# Altium PCB SPITEMP3.PcbDoc
Units mm, origin at the board's own origin, x right, y up, seen from the top; angles counter-clockwise.
Board outline 20.07 x 14.48 mm, 2 copper layers (Top Layer, Bottom Layer); 3 components, 6 nets, 18 pads, 3 vias.
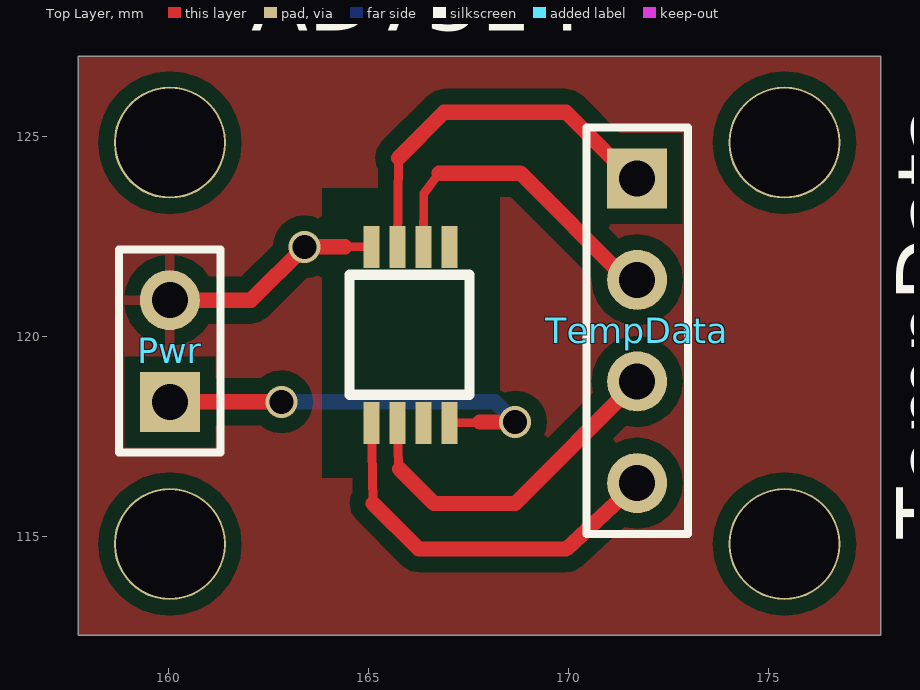
[diagram p0: Top Layer view]
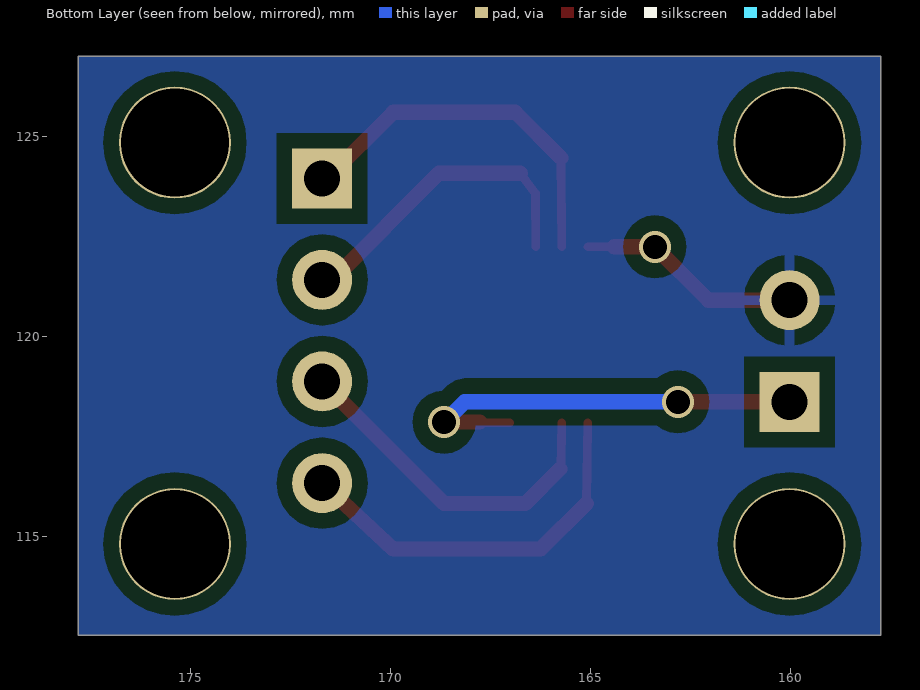
[diagram p1: Bottom Layer view, seen from below]

## Layer stack, top to bottom
Top Layer: signal copper 0.0356
Dielectric: dielectric 0.32, FR-4, Dk 4.8
Bottom Layer: signal copper 0.0356

## Board outline
157.734,127 157.734,112.522 177.8,112.522 177.8,127

## Design rules (kind name [scope] priority, off if disabled: settings)
Clearance ClearanceAD7314 [(InComponent('AD7314'))] p1: gap=0.204
Clearance [All] p2: gap=0.381
ComponentClearance [All] p1: gap=0.254 collisioncheckmode=0
HoleSize [All] p1: absolutevalues=TRUE maxlimit=3 minlimit=0.025 maxpercent=80.000 minpercent=20.000
PolygonConnect [All] p1: connectstyle=Relief reliefconductorwidth=0.254 reliefentries=4 polygonreliefangle="90 Angle"
RoomDefinition SPITEMP3 [InComponentClass('SPITEMP3')] p1: confinementstyle=ConfineIn formatcopy=TRUE lockcomponents=FALSE outline 157.734,112.522 177.8,112.522 177.8,127 157.734,127
RoutingVias [All] p1: holewidth=0.711 width=1.27 viastyle="Through Hole" minholewidth=0.711 minwidth=1.27 maxholewidth=0.711 maxwidth=1.27
SolderMaskExpansion [All] p1: expansion=0.102
TestPointUsage [All] p1: valid=0 allowmultiple=FALSE
Testpoint [All] p1: side=15 testpointundercomponent=TRUE minsize=1.016 maxsize=2.54 preferedsize=1.524 minholesize=0 maxholesize=1.016 preferedholesize=0.813 testpointgrid=0.025 style=1023 order=0-112345678
Width [All] p1: maxlimit=0.4 minlimit=0.203 preferedwidth=0.381
16 further rules are at their usual default settings.

## Components (designator, comment, footprint, x,y, rotation, side; value= is the part's Value field where it differs from the comment)
AD7314 "SPI Temp Sensor" AD7314 167.513,121.539 r270 top
Pwr "" HDR1X2 160.02,118.364 r90 top
TempData "Header for Temperature Data" HDR1X4 171.704,123.952 r270 top

## Footprints (in the part's own frame and the unit in brackets; to place one, negate y for a bottom-side part, rotate by r counter-clockwise, add the part's x,y. Pads: shape width x height; smd on the part's side, far side on the other; paste and mask are expansions set on the pad)
AD7314 [mm] "SPI Temp Sensor"
  rect 1.05x0.4 smd: 1(-0.7,-0.5) 2(-0.7,-1.15) 3(-0.7,-1.8) 4(-0.7,-2.45) 5(3.7,-2.45) 6(3.7,-1.8) 7(3.7,-1.15) 8(3.7,-0.5)
  silkscreen extent 0,-3 3,0
HDR1X2 [mm] "Connector; Header; 2 Position"
  rect 1.5x1.5 hole 0.9: 1(0,0)
  round 1.5 hole 0.9: 2(2.54,0)
  silkscreen extent -1.27,-1.27 3.81,1.27
HDR1X4 [mm] "Connector; Header; 4 Position"
  rect 1.5x1.5 hole 0.9: 1(0,0)
  round 1.5 hole 0.9: 2(2.54,0) 3(5.08,0) 4(7.62,0)
  silkscreen extent -1.27,-1.27 8.89,1.27

## Part data
AD7314: library part AD7314, "SPI Temp Sensor (8-lead MSOP"
Pwr: library part "Header 2", "Header, 2-Pin"
TempData: library part "Header 4", "Header, 4-Pin"

## Free pads (board coordinates)
  round 2.8 hole 2.7: ""(160.02,114.808) ""(160.02,124.841) ""(175.387,114.808) ""(175.387,124.841)

## Via types
v1: diameter 0.8, hole 0.6, Top Layer to Bottom Layer, 3 vias

## Nets (pads, with @x,y where several pads share a name; then routed paths per layer and width w, separated by ;. In a path a pad name is that pad's centre, name@x,y a point inside that pad or via, vN(x,y) a via of type N, cw(c..) or ccw(c..) an arc to the next point about the centre after c; other vN are vias at no path point)
5V: AD7314.8 Pwr.1 | length 10.5
  Top Layer w0.22: AD7314.8 167.75,117.839
  Top Layer w0.381: Pwr.1 v1(162.814,118.364) ; 167.767,117.856 v1(168.656,117.856)
  Bottom Layer w0.381: v1(162.814,118.364) 168.148,118.364 v1(168.656,117.856)
CE: AD7314.2 TempData.2 | length 8
  Top Layer w0.22: AD7314.2 166.37,123.571 166.751,124.079
  Top Layer w0.381: 166.751,124.079 168.783,124.079 171.45,121.412 TempData.2
GND: AD7314.4 Pwr.2 | length 5.6
  Top Layer w0.22: 164.403,122.239 AD7314.4
  Top Layer w0.381: Pwr.2 162.052,120.904 v1(163.387,122.239) 164.403,122.239
SCK: AD7314.3 TempData.1 | length 9.3
  Top Layer w0.22: AD7314.3 165.735,124.46
  Top Layer w0.381: 165.735,124.46 166.878,125.603 169.926,125.603 171.577,123.952 TempData.1
SDI: AD7314.6 TempData.3 | length 8.7
  Top Layer w0.22: AD7314.6 165.735,116.713
  Top Layer w0.381: 165.766,116.682 166.624,115.824 168.656,115.824 TempData.3
SDO: AD7314.5 TempData.4 | length 9.7
  Top Layer w0.22: AD7314.5 165.1,115.824
  Top Layer w0.381: 165.1,115.824 166.243,114.681 169.926,114.681 TempData.4
pads on no net: AD7314.1 AD7314.7

## Polygon pours and split planes (outlines as drawn)
GND on Top Layer (solid, remove dead copper): 157.734,127 177.8,127 177.8,112.522 157.734,112.522
GND on Bottom Layer (solid, remove dead copper): 157.734,127 157.734,112.522 177.8,112.522 177.8,127